# EAGLE board CT_schematic (EAGLE 7.6.0)

Size 100 x 80 mm. Coordinates in mm from the lower left corner, seen from the top.
Outline: 0,0 100,0 100,80 0,80 0,0
Copper layers (1*16): Top 0.035mm / dielectric 1.5mm / Bottom 0.035mm
Design rules "default": minimum track width 10mil, minimum drill 24mil, track to track 8mil, track to pad 8mil, pad to pad 8mil, via to via 8mil, smd to smd 8mil, copper to edge 40mil, drill to drill 8mil, minimum pad ring 10mil, minimum via ring 8mil, stop-mask expansion 4mil, vias tented up to drill 0mil, thermal gap 10mil

## Footprints (pad centres in the part's own frame; a part is rotated, then mirrored left to right if it is on the bottom)
C0603 = smd 0.8 x 0.8: 1 -0.762,0; 2 0.762,0
C0402 = smd 0.5 x 0.5: 1 -0.508,0; 2 0.508,0
C1210 = smd 1.2 x 2.5: 1 -1.524,0; 2 1.524,0
EXV-9H = smd 3.505 x 1.676: 1 -2.857,0; 2 2.857,0
L0603 = smd 0.8 x 0.8: 1 -0.762,0; 2 0.762,0
L1210 = smd 1.2 x 2.5: 1 -1.524,0; 2 1.524,0
PJ-037B_PACKAGE = drill 3.7 square: 1 12,0 | drill 3.2 square: 2 6,0
R0603 = smd 0.8 x 0.8: 1 -0.762,0; 2 0.762,0
LQFP100 = smd 0.3 x 1.2: 1 -6,-7.75; 2 -5.5,-7.75; 3 -5,-7.75; 4 -4.5,-7.75; 5 -4,-7.75; 6 -3.5,-7.75; 7 -3,-7.75; 8 -2.5,-7.75; 9 -2,-7.75; 10 -1.5,-7.75; 11 -1,-7.75; 12 -0.5,-7.75; 13 0,-7.75; 14 0.5,-7.75; 15 1,-7.75; 16 1.5,-7.75; 17 2,-7.75; 18 2.5,-7.75; 19 3,-7.75; 20 3.5,-7.75; 21 4,-7.75; 22 4.5,-7.75; 23 5,-7.75; 24 5.5,-7.75; 25 6,-7.75; 51 6,7.75; 52 5.5,7.75; 53 5,7.75; 54 4.5,7.75; 55 4,7.75; 56 3.5,7.75; 57 3,7.75; 58 2.5,7.75; 59 2,7.75; 60 1.5,7.75; 61 1,7.75; 62 0.5,7.75; 63 0,7.75; 64 -0.5,7.75; 65 -1,7.75; 66 -1.5,7.75; 67 -2,7.75; 68 -2.5,7.75; 69 -3,7.75; 70 -3.5,7.75; 71 -4,7.75; 72 -4.5,7.75; 73 -5,7.75; 74 -5.5,7.75; 75 -6,7.75 | smd 1.2 x 0.3: 26 7.75,-6; 27 7.75,-5.5; 28 7.75,-5; 29 7.75,-4.5; 30 7.75,-4; 31 7.75,-3.5; 32 7.75,-3; 33 7.75,-2.5; 34 7.75,-2; 35 7.75,-1.5; 36 7.75,-1; 37 7.75,-0.5; 38 7.75,0; 39 7.75,0.5; 40 7.75,1; 41 7.75,1.5; 42 7.75,2; 43 7.75,2.5; 44 7.75,3; 45 7.75,3.5; 46 7.75,4; 47 7.75,4.5; 48 7.75,5; 49 7.75,5.5; 50 7.75,6; 76 -7.75,6; 77 -7.75,5.5; 78 -7.75,5; 79 -7.75,4.5; 80 -7.75,4; 81 -7.75,3.5; 82 -7.75,3; 83 -7.75,2.5; 84 -7.75,2; 85 -7.75,1.5; 86 -7.75,1; 87 -7.75,0.5; 88 -7.75,0; 89 -7.75,-0.5; 90 -7.75,-1; 91 -7.75,-1.5; 92 -7.75,-2; 93 -7.75,-2.5; 94 -7.75,-3; 95 -7.75,-3.5; 96 -7.75,-4; 97 -7.75,-4.5; 98 -7.75,-5; 99 -7.75,-5.5; 100 -7.75,-6
SOIC-8 = smd 1.6 x 0.6: 1 -2.7,1.905 | smd 1.55 x 0.6: 2 -2.7,0.635; 3 -2.7,-0.635; 4 -2.7,-1.905; 5 2.7,-1.905; 6 2.7,-0.635; 7 2.7,0.635; 8 2.7,1.905
SSOP-16 = smd 1.981 x 0.356: 1 -2.464,2.223; 2 -2.464,1.587; 3 -2.464,0.953; 4 -2.464,0.318; 5 -2.464,-0.318; 6 -2.464,-0.953; 7 -2.464,-1.587; 8 -2.464,-2.223; 9 2.464,-2.223; 10 2.464,-1.587; 11 2.464,-0.953; 12 2.464,-0.318; 13 2.464,0.318; 14 2.464,0.953; 15 2.464,1.587; 16 2.464,2.223
HTSS-105-01-G-D = drill 1 pad 1.8 square: 1 0,0 | drill 1 pad 1.8: 2 0,2.54; 3 2.54,0; 4 2.54,2.54; 5 5.08,0; 6 5.08,2.54; 7 7.62,0; 8 7.62,2.54; 9 10.16,0; 10 10.16,2.54
DFN8-S = smd 0.6 x 0.4: 1 -2.69,1.905; 2 -2.69,0.635; 3 -2.69,-0.635; 4 -2.69,-1.905; 5 2.69,-1.905; 6 2.69,-0.635; 7 2.69,0.635; 8 2.69,1.905
ABS07-32.768KHZ-7-T = smd 1.1 x 2.4: 1 -2.5,0; 2 0,0
ABLS-25.000MHZ-B2F-T = smd 5.6 x 2.8: 1 -3.81,0; 2 5.69,0
WSON-8 = smd 0.3 x 0.6: 1 -0.75,0; 2 0.05,0; 3 0.85,0; 4 1.65,0; 5 1.65,3.8; 6 0.85,3.8; 7 0.05,3.8; 8 -0.75,3.8 | smd 3 x 2.6: PAD 0.45,1.9
SON-6 = smd 0.55 x 0.3: 1 -0.355,0.5 | smd 0.52 x 0.3: 2 -0.37,0; 3 -0.37,-0.5; 4 0.37,-0.5; 5 0.37,0; 6 0.37,0.5
SW_4-1437565-2 = smd 1.4 x 2.1: 1 -2.23,4.55; 2 -2.23,-4.55; 3 2.23,4.55; 4 2.23,-4.55
LGM67K-G1J2-24-Z = smd 0.8 x 1.4: A -2,0; C 0,0
NC7SZ125M5X = smd 1.3 x 0.7: 1 -1.3,0.95; 2 -1.3,0; 3 -1.3,-0.95; 4 1.3,-0.95; 5 1.3,0.95

## Placement (x,y rotation side)
C1  1e-06  [C0603]  -41.91,60.96 0 top  (outside the outline)
C2  1e-07  [C0603]  -45.72,60.96 0 top  (outside the outline)
C3  1e-07  [C0603]  -49.53,60.96 0 top  (outside the outline)
C4  1e-07  [C0603]  -53.34,60.96 0 top  (outside the outline)
C5  1e-07  [C0603]  -57.15,60.96 0 top  (outside the outline)
C6  1e-07  [C0603]  -60.96,60.96 0 top  (outside the outline)
C7  1e-07  [C0603]  -64.77,60.96 0 top  (outside the outline)
C8  4.7e-06  [C0603]  -34.29,60.96 0 top  (outside the outline)
C9  1e-08  [C0603]  -68.58,60.96 0 top  (outside the outline)
C10  1e-08  [C0603]  -15.24,66.04 0 top  (outside the outline)
C11  1e-06  [C0603]  -19.05,66.04 0 top  (outside the outline)
C12  1e-11  [C0402]  -15.24,71.12 0 top  (outside the outline)
C13  1e-11  [C0402]  -19.05,71.12 0 top  (outside the outline)
C14  1e-11  [C0402]  -22.86,71.12 0 top  (outside the outline)
C15  1e-11  [C0402]  -26.67,71.12 0 top  (outside the outline)
C16  1e-08  [C0402]  -30.48,71.12 0 top  (outside the outline)
C17  1e-06  [C0603]  -22.86,66.04 0 top  (outside the outline)
C18  1e-06  [C0603]  -26.67,66.04 0 top  (outside the outline)
C19  2.2e-07  [C0603]  -38.1,60.96 0 top  (outside the outline)
C20  1e-06  [C0603]  -30.48,66.04 0 top  (outside the outline)
C21  1e-06  [C0603]  -34.29,66.04 0 top  (outside the outline)
C22  1e-08  [C0402]  -34.29,71.12 0 top  (outside the outline)
C23  1e-08  [C0402]  -38.1,71.12 0 top  (outside the outline)
C24  1e-08  [C0402]  -41.91,71.12 0 top  (outside the outline)
C25  1e-05  [C1210]  -48.26,49.53 0 top  (outside the outline)
C26  1e-05  [C1210]  -54.61,49.53 0 top  (outside the outline)
C27  1e-07  [C0402]  -45.72,71.12 0 top  (outside the outline)
C28  0.0001  [EXV-9H]  -17.78,41.91 0 top  (outside the outline)
C29  0.0001  [EXV-9H]  -29.21,41.91 0 top  (outside the outline)
C30  1e-08  [C0402]  -49.53,71.12 0 top  (outside the outline)
F1  240.0  [L0603]  -38.1,66.04 0 top  (outside the outline)
I1  1e-05  [L1210]  -60.96,49.53 0 top  (outside the outline)
J1  PJ-037B  [PJ-037B_PACKAGE]  -48.26,7.62 0 top  (outside the outline)
R2  1000.0  [R0603]  -41.91,66.04 0 top  (outside the outline)
R4  4700.0  [R0603]  -45.72,66.04 0 top  (outside the outline)
R5  2200.0  [R0603]  -49.53,66.04 0 top  (outside the outline)
R6  2200.0  [R0603]  -53.34,66.04 0 top  (outside the outline)
R7  2200.0  [R0603]  -57.15,66.04 0 top  (outside the outline)
R8  2200.0  [R0603]  -60.96,66.04 0 top  (outside the outline)
R9  10000.0  [R0603]  -35.56,55.88 0 top  (outside the outline)
R10  10000.0  [R0603]  -40.64,55.88 0 top  (outside the outline)
R11  10000.0  [R0603]  -45.72,55.88 0 top  (outside the outline)
R12  10000.0  [R0603]  -50.8,55.88 0 top  (outside the outline)
R13  100000.0  [R0603]  -15.24,55.88 0 top  (outside the outline)
R14  10000.0  [R0603]  -55.88,55.88 0 top  (outside the outline)
R15  10000.0  [R0603]  -60.96,55.88 0 top  (outside the outline)
R16  10000.0  [R0603]  -66.04,55.88 0 top  (outside the outline)
R17  10000.0  [R0603]  -15.24,60.96 0 top  (outside the outline)
R18  100000.0  [R0603]  -20.32,55.88 0 top  (outside the outline)
R19  1500.0  [R0603]  -64.77,66.04 0 top  (outside the outline)
R20  1000.0  [R0603]  -68.58,66.04 0 top  (outside the outline)
R21  10000.0  [R0603]  -20.32,60.96 0 top  (outside the outline)
R22  10000.0  [R0603]  -25.4,60.96 0 top  (outside the outline)
R23  18000.0  [R0603]  -30.48,60.96 0 top  (outside the outline)
R24  470000.0  [R0603]  -25.4,55.88 0 top  (outside the outline)
R25  120000.0  [R0603]  -30.48,55.88 0 top  (outside the outline)
U1  STM32F101V8T6  [LQFP100]  -24.13,8.89 0 top  (outside the outline)
U2  AT25080B-SSHL-T  [SOIC-8]  -41.91,33.02 0 top  (outside the outline)
U3  LTC2804CGN-1#PBF  [SSOP-16]  -29.21,22.86 0 top  (outside the outline)
U4  HTSS-105-01-G-D  [HTSS-105-01-G-D]  -60.96,21.59 0 top  (outside the outline)
U5  M24M02-DRMN6TP  [SOIC-8]  -25.4,33.02 0 top  (outside the outline)
U6  24AA512-I/MF  [DFN8-S]  -43.18,22.86 0 top  (outside the outline)
U7  ABS07-32.768KHZ-7-T  [ABS07-32.768KHZ-7-T]  -27.94,49.53 0 top  (outside the outline)
U8  ABLS-25.000MHZ-B2F-T  [ABLS-25.000MHZ-B2F-T]  -48.26,41.91 0 top  (outside the outline)
U9  LP3878SDX-ADJ/NOPB  [WSON-8]  -63.5,31.75 0 top  (outside the outline)
U10  TPS3895ADRYR  [SON-6]  -52.07,69.85 0 top  (outside the outline)
U11  4-1437565-2  [SW_4-1437565-2]  -64.77,6.35 0 top  (outside the outline)
U12  Q65110A2395  [LGM67K-G1J2-24-Z]  -36.83,49.53 0 top  (outside the outline)
U13  nc7sz125m5x  [NC7SZ125M5X]  -66.04,48.26 0 top  (outside the outline)

## Library data of the parts
C1-C30 F1 I1 J1 R2 R4-R25 U1-U13 = circuit_tree

## Nets
CLK_CRYSTAL_U1_8: C12.1 U1.8 U7.1
CLK_CRYSTAL_U1_9: C13.1 U1.9 U7.2
CLK_CRYSTAL_U1_12: C14.1 U1.12 U8.1
CLK_CRYSTAL_U1_13: C15.1 U1.13 U8.2
GND: C1.2 C2.2 C3.2 C4.2 C5.2 C6.2 C7.2 C8.2 C9.2 C10.2 C11.2 C12.2 C13.2 C14.2 C15.2 C16.2 C17.2 C18.2 C20.2 C21.2 C22.2 C23.2 C24.2 C25.2 C26.2 C27.2 C28.2 C29.2 C30.2 J1.2 R2.2 R9.2 R14.2 R16.2 R17.2 R20.2 R23.2 R25.2 U1.10 U1.19 U1.20 U1.27 U1.49 U1.74 U1.99 U2.4 U3.8 U4.9 U5.4 U6.4 U9.3 U9.PAD U10.2 U12.C U13.1 U13.3
NET_U1_14: R4.1 U1.14 U13.4
NET_U1_22: C9.1 C10.1 C11.1 F1.1 U1.21 U1.22
NET_U1_47: R7.1 U1.47 U5.6
NET_U1_48: R8.1 U1.48 U5.5
NET_U1_92: R5.1 U1.92 U6.6
NET_U1_93: R6.1 U1.93 U6.5
NET_U1_94: R9.1 U1.94
NET_U1_97: U12.A
NET_U1_98: U11.3 U11.4
NET_U2_3: R10.1 U2.3
NET_U2_7: R12.1 U2.7
NET_U3_6: C17.1 U3.6
NET_U3_7: C19.1 I1.2 U3.7
NET_U3_9: C18.1 U3.9
NET_U3_10: C19.2 U3.10
NET_U3_11: R13.1 U3.11
NET_U4_3: U3.1 U4.3
NET_U4_4: U3.2 U4.4
NET_U4_5: U3.3 U4.5
NET_U4_6: U3.4 U4.6
NET_U5_3: R14.1 U5.3
NET_U6_1: R15.1 U6.1
NET_U6_2: R16.1 U6.2
NET_U6_3: R17.1 U6.3
NET_U9_1: C24.1 U9.1
NET_U9_6: R19.2 R20.1 U9.6
NET_U9_8: R18.1 U9.8
NET_U10_1: R22.1 R23.1 U10.1
NET_U10_3: R24.2 R25.1 U10.3
NET_U10_4: R21.1 U10.4 U13.2
NET_U11_1: R2.1 U11.1 U11.2
PROC_SPI1_MISO: U1.31 U2.2
PROC_SPI1_MOSI: U1.32 U2.5
PROC_SPI1_NSS: R11.1 U1.29 U2.1
PROC_SPI1_SCK: U1.30 U2.6
PROC_USART1_CTS: U1.70 U3.13
PROC_USART1_RX: U1.69 U3.16
PROC_USART1_TX: U1.68 U3.14
VCC_S1_12V8: C25.1 C28.1 C29.1 J1.1 R18.2 U9.4
VCC_TIER1_2V5: C1.1 C2.1 C3.1 C4.1 C5.1 C6.1 C7.1 C8.1 C16.1 C20.1 C21.1 C22.1 C23.1 C26.1 C27.1 C30.1 F1.2 I1.1 R4.2 R5.2 R6.2 R7.2 R8.2 R10.2 R11.2 R12.2 R13.2 R15.2 R19.1 R21.2 R22.2 R24.1 U1.6 U1.11 U1.28 U1.50 U1.75 U1.100 U2.8 U3.5 U3.12 U5.8 U6.7 U6.8 U9.5 U10.6 U13.5

## Tracks (layer width: path | path; a pad name or v marks a point on that pad's centre or on a via)
CLK_CRYSTAL_U1_8  (2 unrouted)
CLK_CRYSTAL_U1_9  (2 unrouted)
CLK_CRYSTAL_U1_12  (2 unrouted)
CLK_CRYSTAL_U1_13  (2 unrouted)
GND  (55 unrouted)
NET_U1_14  (2 unrouted)
NET_U1_22  (5 unrouted)
NET_U1_47  (2 unrouted)
NET_U1_48  (2 unrouted)
NET_U1_92  (2 unrouted)
NET_U1_93  (2 unrouted)
NET_U1_94  (1 unrouted)
NET_U1_98  (1 unrouted)
NET_U2_3  (1 unrouted)
NET_U2_7  (1 unrouted)
NET_U3_6  (1 unrouted)
NET_U3_7  (2 unrouted)
NET_U3_9  (1 unrouted)
NET_U3_10  (1 unrouted)
NET_U3_11  (1 unrouted)
NET_U4_3  (1 unrouted)
NET_U4_4  (1 unrouted)
NET_U4_5  (1 unrouted)
NET_U4_6  (1 unrouted)
NET_U5_3  (1 unrouted)
NET_U6_1  (1 unrouted)
NET_U6_2  (1 unrouted)
NET_U6_3  (1 unrouted)
NET_U9_1  (1 unrouted)
NET_U9_6  (2 unrouted)
NET_U9_8  (1 unrouted)
NET_U10_1  (2 unrouted)
NET_U10_3  (2 unrouted)
NET_U10_4  (2 unrouted)
NET_U11_1  (2 unrouted)
PROC_SPI1_MISO  (1 unrouted)
PROC_SPI1_MOSI  (1 unrouted)
PROC_SPI1_NSS  (2 unrouted)
PROC_SPI1_SCK  (1 unrouted)
PROC_USART1_CTS  (1 unrouted)
PROC_USART1_RX  (1 unrouted)
PROC_USART1_TX  (1 unrouted)
VCC_S1_12V8  (5 unrouted)
VCC_TIER1_2V5  (46 unrouted)